# EAGLE board IMU_PCB (EAGLE 9.6.2)
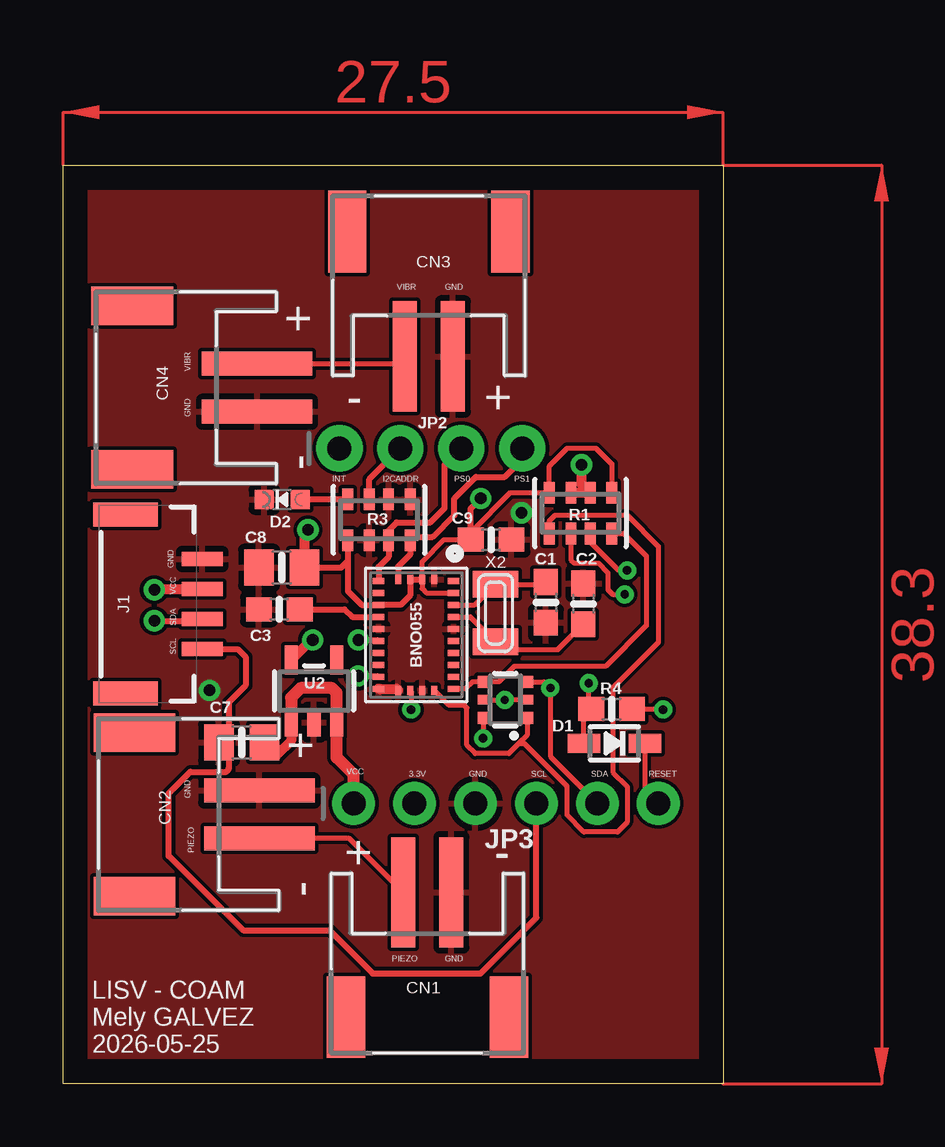
[diagram p0: board, top side]
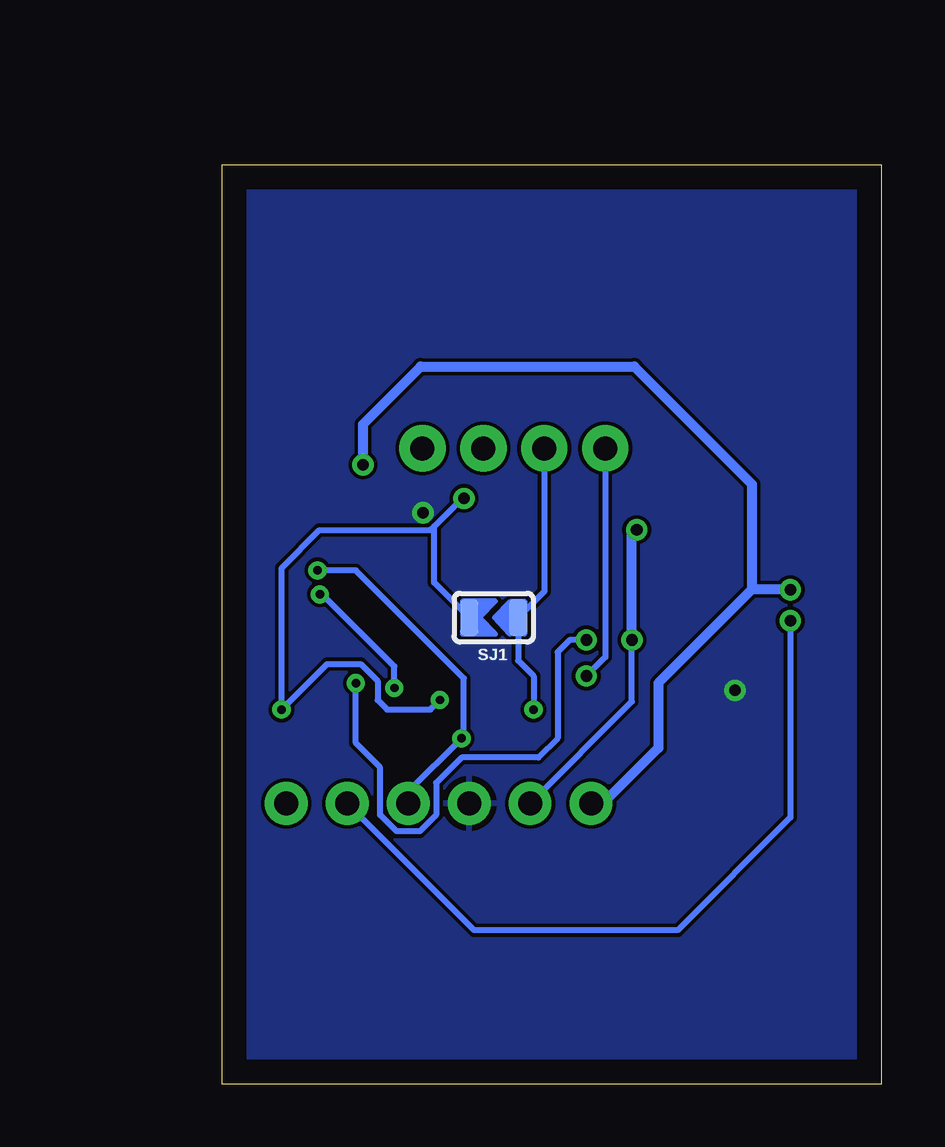
[diagram p1: board, bottom side, seen from below]

Size 27.5 x 38.3 mm. Coordinates in mm from the lower left corner, seen from the top.
Outline: 27.5,0 0,0 0,38.3 27.5,38.3 27.5,0
Copper layers (1*16): Top 0.035mm / dielectric 1.5mm / Bottom 0.035mm
Design rules "default": minimum track width 6mil, minimum drill 0.35mm, track to track 6mil, track to pad 6mil, pad to pad 6mil, via to via 6mil, smd to smd 6mil, copper to edge 40mil, drill to drill 6mil, minimum pad ring 10mil, minimum via ring 8mil, stop-mask expansion 4mil, vias tented up to drill 0mil, thermal gap 10mil
Net classes: 1 highpower: width 0.406 mm, drill 0.483 mm

## Footprints (pad centres in the part's own frame; a part is rotated, then mirrored left to right if it is on the bottom)
BNO055 = smd 0.25 x 0.475: 1 -2.25,1.562; 6 -2.25,-1.562; 7 -1.75,-1.562; 8 -1.25,-1.562; 9 -0.75,-1.562; 10 -0.25,-1.562; 11 0.25,-1.562; 12 0.75,-1.562; 13 1.25,-1.562; 14 1.75,-1.562; 15 2.25,-1.562; 20 2.25,1.562; 21 1.75,1.562; 22 1.25,1.562; 23 0.75,1.562; 24 0.25,1.562; 25 -0.25,1.562; 26 -0.75,1.562; 27 -1.25,1.562; 28 -1.75,1.562 | smd 0.375 x 0.25: 2 -2.312,0.75; 3 -2.312,0.25; 4 -2.312,-0.25; 5 -2.312,-0.75; 16 2.312,-0.75; 17 2.312,-0.25; 18 2.312,0.25; 19 2.312,0.75
0603-NO = smd 1.075 x 1: 1 -0.85,0; 2 0.85,0
0805-NO = smd 1.24 x 1.5: 1 -0.95,0; 2 0.95,0
JST-PH-2-SMT-RA = smd 1 x 4.6: 1 1,-3.7; 2 -1,-3.7 | smd 1.6 x 3.4: NC1 -3.4,1.5; NC2 3.4,1.5
SOD-323 = smd 1.35 x 0.8: A 1.27,0; C -1.27,0
CHIPLED_0603_NOOUTLINE = smd 0.8 x 0.8: A 0,-0.75; C 0,0.75
JST-4-SMD-1.25MM-LOCKING = smd 0.6 x 1.7: 1 -1.875,3.3; 2 -0.625,3.3; 3 0.625,3.3; 4 1.875,3.3 | smd 1 x 2.7: NC1 3.725,0.1; NC2 -3.725,0.1
1X04_ROUND_76 = drill 1 pad 1.93: 1 -3.81,0; 2 -1.27,0; 3 1.27,0; 4 3.81,0
1X06_ROUND_70 = drill 1 pad 1.778: 1 -6.35,0; 2 -3.81,0; 3 -1.27,0; 4 1.27,0; 5 3.81,0; 6 6.35,0
SOT363 = smd 0.5 x 0.5: 1 -0.75,-0.9; 3 0.75,-0.9; 4 0.75,0.9; 6 -0.75,0.9 | smd 0.4 x 0.5: 2 0,-0.9; 5 0,0.9
RESPACK_4X0603 = smd 0.45 x 0.9: 1 -1.3,-0.85; 2 -0.4,-0.85; 3 0.4,-0.85; 4 1.3,-0.85; 5 1.3,0.85; 6 0.4,0.85; 7 -0.4,0.85; 8 -1.3,0.85
SOLDERJUMPER_ARROW_NOPASTE = smd 0.762 x 1.524: 1 -1.016,0; 2 1.016,0
SOT23-5 = smd 0.55 x 1.2: 1 -0.95,-1.3; 2 0,-1.3; 3 0.95,-1.3; 4 0.95,1.3; 5 -0.95,1.3
XTAL3215 = smd 1.1 x 1.9: P$1 1.2,0; P$2 -1.2,0

## Placement (x,y rotation side)
BNO055  BNO055  [BNO055]  14.71,18.71 270 top
C1  22pF  [0603-NO]  20.12,20.07 90 top
C2  22pF  [0603-NO]  21.68,20.01 270 top
C3  0.1uF  [0603-NO]  9.01,19.78 0 top
C7  10uF  [0805-NO]  7.44,14.23 180 top
C8  10uF  [0805-NO]  9.11,21.52 180 top
C9  0.1uF  [0603-NO]  17.83,22.68 0 top
CN1  [JST-PH-2-SMT-RA]  15.18,4.28 180 top
CN2  [JST-PH-2-SMT-RA]  4.48,11.23 90 top
CN3  [JST-PH-2-SMT-RA]  15.24,34.02 0 top
CN4  [JST-PH-2-SMT-RA]  4.38,29.02 90 top
D1  1n4148  [SOD-323]  22.97,14.19 180 top
D2  GREEN  [CHIPLED_0603_NOOUTLINE]  9.13,24.36 90 top
J1  [JST-4-SMD-1.25MM-LOCKING]  2.5,20 270 top
JP2  [1X04_ROUND_76]  15.32,26.49 0 top
JP3  [1X06_ROUND_70]  18.45,11.69 0 top
Q3  BSS138  [SOT363]  18.43,16.01 90 top
R1  10K  [RESPACK_4X0603]  21.56,23.79 180 top
R3  10K  [RESPACK_4X0603]  13.16,23.51 0 top
R4  10K  [0603-NO]  22.85,15.62 180 top
SJ1  [SOLDERJUMPER_ARROW_NOPASTE]  16.16,19.43 180 bottom
U2  AP2112K-3.3  [SOT23-5]  10.45,16.37 0 top
X2  32.768  [XTAL3215]  18.01,19.62 270 top

## Library data of the parts
BNO055 C1-C3 C7-C9 D1 D2 JP2 JP3 Q3 R1 R3 R4 U2 = microbuilder
CN1-CN4 = adafruit
J1 = SparkFun-Connectors; PROD_ID: CONN-15303
SJ1 = microbuilder; BOM: EXCLUDE
X2 = adafruit2

## Nets
3.3V: BNO055.3 BNO055.4 BNO055.8 BNO055.28 C8.1 C9.1 JP3.2 Q3.2 Q3.5 R1.1 R1.4 R3.1 R4.1 SJ1.2 U2.5
GND: BNO055.2 BNO055.10 BNO055.15 BNO055.16 BNO055.18 BNO055.25 C1.1 C2.1 C3.1 C7.2 C8.2 C9.2 CN1.2 CN2.1 CN3.1 CN4.2 D2.C J1.1 JP3.3 R3.2 R3.5 R3.6 U2.2
I2CADDR_3V: BNO055.17 JP2.2 R3.7 SJ1.1
INT_3V: BNO055.14 JP2.1
N$1: BNO055.27 C1.2 X2.P$2
N$2: BNO055.26 C2.2 X2.P$1
N$3: BNO055.9 C3.2
N$4: D2.A R3.8
NRESET_3V: BNO055.11 D1.A R4.2
PIEZO: CN1.1 CN2.2
PS0_3V: BNO055.6 JP2.3 R3.3
PS1_3V: BNO055.5 JP2.4 R3.4
RESET: D1.C JP3.6
SCL: J1.4 JP3.4 Q3.6 R1.7
SCL_3V: BNO055.19 Q3.1 R1.5
SDA: J1.3 JP3.5 Q3.3 R1.6
SDA_3V: BNO055.20 Q3.4 R1.8
VCC [highpower]: C7.1 J1.2 JP3.1 R1.2 R1.3 U2.1 U2.3
VIBR: CN3.2 CN4.1

## Tracks (layer width: path | path; a pad name or v marks a point on that pad's centre or on a via)
3.3V  (via drill 0.35, 0.48)
  Top 0.2: R4.1 24.98,15.62 v25,15.6 | Q3.5 v18.39,16.01 | v18.39,16.01 v18.4,16 | Q3.2 v18.39,16.01 | BNO055.28 15.14,20.46 14.96,20.64 BNO055.3 14.96,21.76 15.88,22.68 C9.1 16.98,22.98 18.64,24.64 R1.4 20.26,25.76 21,26.5 22.2,26.5 22.86,25.84 R1.1
  Top 0.25: C9.1 16.98,23.98 v17.4,24.4 | BNO055.3 BNO055.4 14.46,20.36 14.06,19.96 BNO055.8 12.44,19.96 12.2,20.2 11.86,20.54 11.86,21.8 | R3.1 11.86,21.8 | C8.1 11.58,21.52 11.86,21.8 | 10.33,18.5 v10.4,18.5
  Top 0.406: C8.1 10.06,22.96 v10.2,23.1 | U2.5 10.33,18.5
  Bottom 0.25: JP3.2 10.4,15.93 v10.4,18.5 | SJ1.2 18.64,20.89 18.64,23.24 | 18.64,23.24 17.48,24.4 v17.4,24.4 | v18.4,16 18.8,15.6 20.6,15.6 21,16 21,16.8 21.7,17.5 23.1,17.5 v25,15.6 25,21.5 23.42,23.08 18.8,23.08 18.64,23.24
  Bottom 0.406: v10.4,18.5 10.4,22.9 v10.2,23.1
GND  (via drill 0.48)
  Top 0.406: BNO055.15 13.9,16.46 BNO055.16
  other vias: 19.1,23.8 6.1,16.4
  pour Bottom: 0,38.3 0,0 27.5,0 27.5,38.3
  pour Top: 0,38.3 0,0 27.5,0 27.5,38.3
I2CADDR_3V  (via drill 0.35)
  Top 0.2: BNO055.17 14.5,16.36 v14.5,15.6
  Top 0.25: R3.7 12.76,25.2 JP2.2
  Bottom 0.25: JP2.2 14.05,20.52 SJ1.1 15.14,17.64 14.5,17 v14.5,15.6
INT_3V  (via drill 0.48)
  Top 0.25: v12.3,17 13.11,17 BNO055.14
  Bottom 0.25: JP2.1 11.51,17.79 v12.3,17
N$1
  Top 0.2: BNO055.27 17.15,19.96 X2.P$2 20.02,20.82
  Top 0.3: 20.02,20.82 C1.2
N$2
  Top 0.2: BNO055.26 16.97,19.46 X2.P$1 | C2.2 20.62,18.1 18.7,18.1
  Top 0.406: 18.7,18.1 18.38,18.42 X2.P$1
N$3
  Top 0.25: C3.2 11.72,19.78 12.04,19.46 BNO055.9
N$4
  Top 0.25: R3.8 D2.A
NRESET_3V  (via drill 0.35, 0.48)
  Top 0.2: D1.A 21.7,15.32 R4.2 21.9,15.72 v21.9,16.7
  Top 0.25: v12.3,18.5 13.11,18.5 BNO055.11
  Bottom 0.25: v12.3,18.5 13,18.5 13.5,18 13.5,14.4 14.3,13.6 17.5,13.6 18.55,12.55 18.55,11.21 19.24,10.52 20.2,10.52 20.89,11.21 20.89,13.19 21.9,14.2 v21.9,16.7
PIEZO
  Top 0.2: CN1.1 11.93,10.23 CN2.2
PS0_3V
  Top 0.25: JP2.3 15.9,25.8 15.9,24.57 15.9,24 15.3,23.4 13.9,23.4 13.56,23.06 R3.3 13.56,21.96 13.15,21.55 BNO055.6
PS1_3V
  Top 0.25: JP2.4 19.13,26.03 18.4,25.3 17.2,25.3 16.3,24.4 16.3,23.7 15.4,22.8 14.6,22.8 R3.4 14.46,22.06 13.96,21.56 BNO055.5
RESET
  Top 0.2: D1.C 24.24,12.25 JP3.6
SCL  (via drill 0.35)
  Top 0.2: R1.7 21.96,22.59 23.15,21.4 v23.5,21.4 | Q3.6 17.5,15.23 v17.5,14.4
  Top 0.25: J1.4 7.27,18.12 7.6,17.8 7.6,16.6 6.89,15.89 6.89,13.16 6.9,13.16 6.9,13.1 6.81,13.01 5.31,13.01 4.4,12.1 4.4,9.5 7.5,6.4 11.1,6.4 12.9,4.6 17.4,4.6 19.72,6.92 JP3.4
  Bottom 0.25: JP3.4 19.72,12.18 v17.5,14.4 17.4,14.5 17.4,16.9 21.9,21.4 v23.5,21.4
SCL_3V
  Top 0.2: R1.5 20.26,23.46 20.5,23.7 23.5,23.7 24.8,22.4 24.8,18.4 22.91,16.51 22.91,12.99 23.5,12.4 23.5,10.9 23.1,10.5 21.7,10.5 21,11.2 21,12.4 19.23,14.17 18.97,14.17 | BNO055.19 16.06,15.8 16.7,15.8 16.83,15.67 16.83,14.1 17.16,13.77 18.57,13.77 18.97,14.17 | Q3.1 19.33,14.53 18.97,14.17
SDA  (via drill 0.35, 0.48)
  Top 0.2: R1.6 21.16,21.84 21.3,21.7 22.3,21.7 22.7,21.3 22.7,20.6 22.9,20.4 v23.4,20.4 | Q3.3 20.04,16.76 v20.3,16.5 20.3,13.65 JP3.5
  Top 0.25: v3.8,19.3 5.72,19.3 J1.3
  Bottom 0.25: v20.3,16.5 20.3,17.4 23.3,20.4 v23.4,20.4 | v3.8,19.3 3.8,11.1 8.5,6.4 16.97,6.4 JP3.5
SDA_3V
  Top 0.2: R1.8 23.36,22.94 24.3,22 24.3,19.1 22.6,17.4 18.8,17.4 18.16,16.76 Q3.4 17.06,16.76 16.76,16.46 BNO055.20
VCC  (via drill 0.48)
  Top 0.406: R1.3 R1.2 21.6,25 v21.6,25.8 | v3.8,20.6 3.82,20.62 J1.2 | U2.1 9.5,14.3 8.91,13.71 C7.1
  Top 0.5: JP3.1 12.1,12.9 11.4,13.6 U2.3 11.4,16.3 11.2,16.5 9.9,16.5 9.5,16.1 U2.1
  Bottom 0.406: v3.8,20.6 5.4,20.6 | 5.4,20.6 9.3,16.7 9.3,14 11.61,11.69 JP3.1 | v21.6,25.8 21.6,27.5 19.2,29.9 10.3,29.9 5.4,25 5.4,20.6
VIBR
  Top 0.2: CN4.1 13.94,30.02 CN3.2
(copper drawn outside any net)
  shapes: Top area x2

## Text on the board
tNames: VIBR | GND | VIBR | GND | INT | I2CADDR | PS0 | PS1 | GND | VCC | SDA | SCL | VCC | 3.3V | GND | SCL | SDA | RESET | GND | PIEZO | PIEZO | GND | LISV - COAM / Mely GALVEZ / 2026-05-25